# EAGLE board CORAZON_BIOMAKERS (EAGLE 9.3.0)
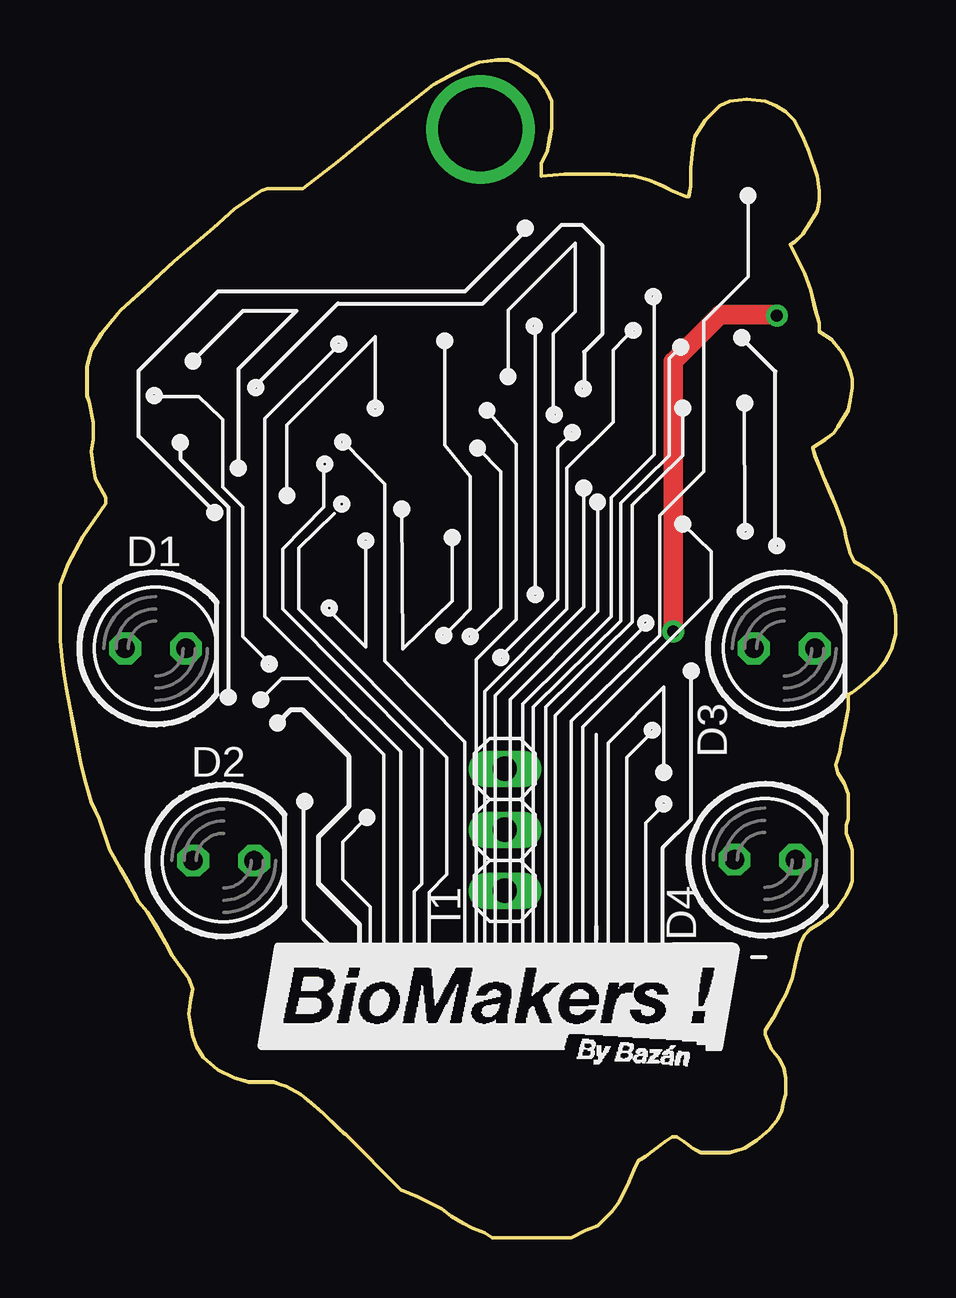
[diagram p0: board, top side]
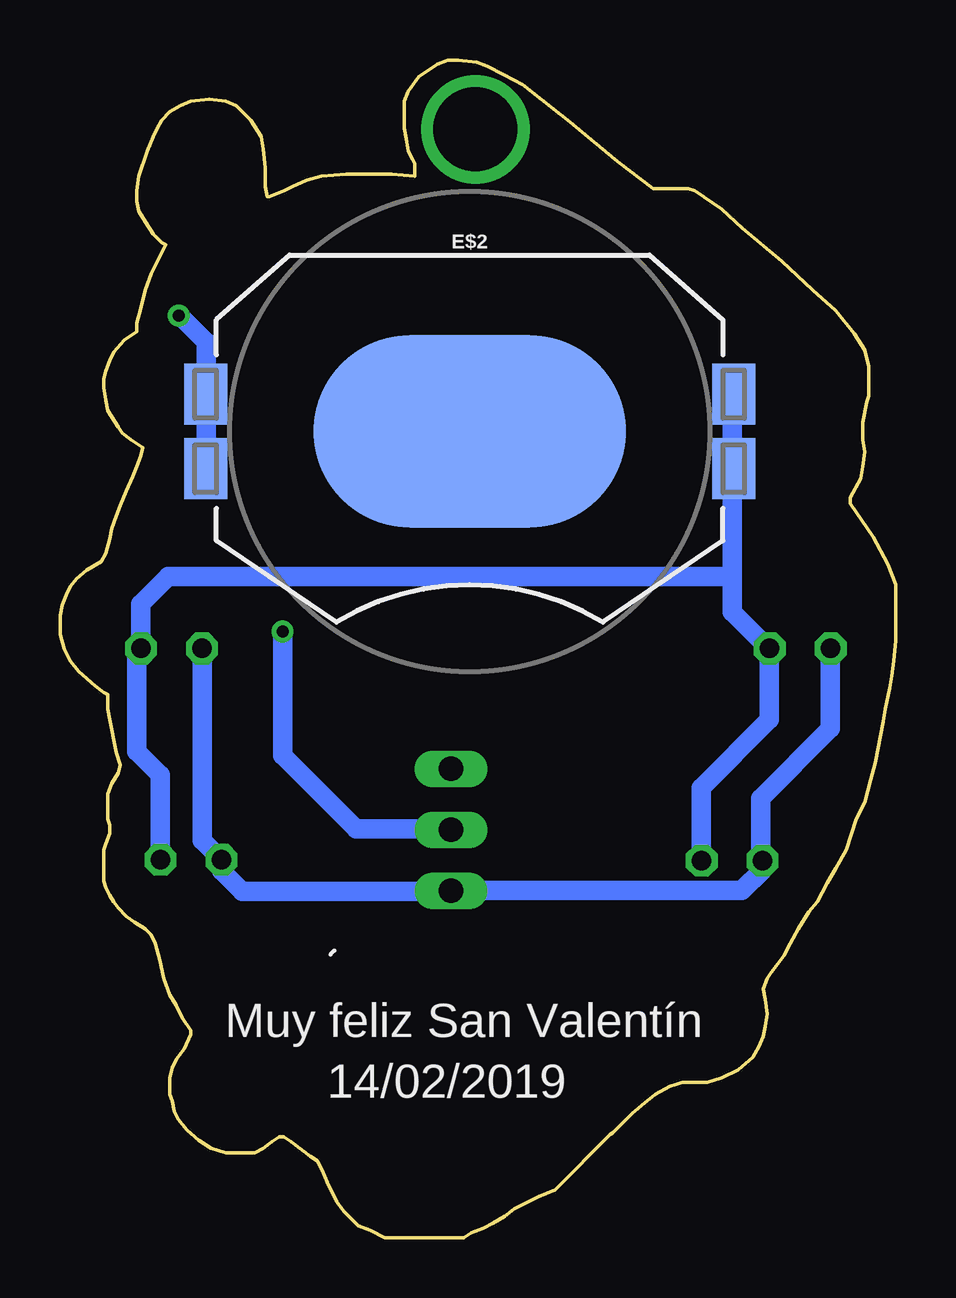
[diagram p1: board, bottom side, seen from below]

Size 34.83 x 49.09 mm. Coordinates in mm from the lower left corner, seen from the top.
Outline: 10.97,5.19 11.56,4.6 11.67,4.5 11.8,4.38 11.9,4.3 14.2,2 14.9,1.7 15.9,1.2 16.3,0.9 16.8,0.6 17.2,0.4 17.7,0.2 18,0 21.3,0 21.9,0.3 22.4,0.5 23,1.1 23.3,1.5 23.7,2.3 23.9,2.8 24.1,3.2 24.4,3.4 25.2,4 25.5,4.2 25.7,4.2 26,4 26.36,3.72 26.7,3.55 27.91,3.55 28.52,3.72 29.04,4.07 29.56,4.5 29.9,4.93 30.07,5.28 30.16,5.71 30.25,5.97 30.25,6.66 30.16,7.09 29.99,7.44 29.64,7.87 29.38,8.47 29.38,8.65 29.73,9.17 29.99,9.68 30.25,10.12 30.51,10.81 30.68,11.59 30.85,12.28 31.02,12.62 31.28,12.88 31.72,13.14 32.06,13.4 32.41,13.75 32.58,14.01 32.75,14.26 32.93,14.61 33.01,14.87 33.01,16.17 32.93,16.42 32.75,16.86 32.75,17.2 32.84,17.46 32.84,18.5 32.67,18.93 32.41,19.36 32.32,19.71 32.49,20.23 32.58,20.75 32.67,21.18 32.75,21.61 32.84,22.04 32.84,22.65 33.01,22.73 33.36,22.99 34.05,23.6 34.39,24.03 34.65,24.55 34.83,25.15 34.83,25.93 34.74,26.36 34.57,26.8 34.39,27.14 34.14,27.49 33.7,27.83 33.1,28.18 32.93,28.52 32.75,29.13 32.67,29.56 32.49,30.08 32.32,30.51 32.06,31.12 31.8,31.72 31.63,32.15 31.46,32.59 31.37,32.93 31.89,33.28 32.23,33.54 32.41,33.8 32.84,34.49 32.93,34.92 33.01,35.44 33.01,35.78 32.93,36.13 32.75,36.56 32.58,36.91 32.15,37.43 31.63,37.77 31.63,38.12 31.46,38.72 31.28,39.5 31.02,40.19 30.59,41.05 30.42,41.4 30.59,41.49 30.94,41.83 31.28,42.35 31.54,42.78 31.63,43.22 31.63,43.65 31.54,44.25 31.2,45.29 30.94,45.89 30.77,46.24 30.59,46.59 30.25,46.93 29.81,47.19 29.38,47.36 28.6,47.45 27.91,47.36 27.48,47.19 26.88,46.59 26.44,45.89 26.36,45.38 26.27,44.6 26.27,43.82 26.18,43.39 26.1,43.39 25.49,43.65 25.15,43.82 24.54,44.08 23.94,44.25 22.9,44.34 21,44.34 20.05,44.25 20.05,44.77 20.14,44.94 20.31,45.29 20.39,45.81 20.48,46.24 20.48,47.36 20.31,47.8 19.88,48.4 19.1,48.92 18.67,49.09 18.23,49.09 17.46,49.01 17.02,48.83 16.33,48.49 15.56,48.05 13.57,46.5 11.58,44.86 10.11,43.73 8.64,43.73 8.38,43.65 7.26,42.87 6.39,42.09 4.75,40.71 3.46,39.5 2.51,38.63 1.73,37.68 1.3,36.99 1.12,36.3 1.12,35.09 1.21,34.83 1.38,33.97 1.38,33.28 1.3,32.76 1.38,32.15 1.47,31.63 1.9,30.86 1.9,30.6 0.95,29.22 0.35,28.09 0,27.23 0,24.89 0.09,24.03 0.17,23.42 0.26,22.91 0.43,22.04 0.52,21.52 0.86,19.8 1.04,19.1 1.3,18.15 1.64,17.46 2.07,16.17 2.51,15.39 2.85,14.78 3.28,14.01 3.63,13.57 4.06,12.88 4.41,12.28 4.67,11.76 4.93,11.41 5.18,11.07 5.36,10.81 5.53,10.38 5.44,9.94 5.36,9.34 5.44,8.82 5.53,8.39 5.7,7.96 5.96,7.52 6.57,7.01 7.26,6.66 7.86,6.49 8.9,6.49 9.16,6.4 9.42,6.31 10.02,5.97 10.46,5.62 10.97,5.19
Copper layers (1*16): Top 0.035mm / dielectric 1.5mm / Bottom 0.035mm
Design rules "default": minimum track width 6mil, minimum drill 0.35mm, track to track 6mil, track to pad 6mil, pad to pad 6mil, via to via 6mil, smd to smd 6mil, copper to edge 40mil, drill to drill 6mil, minimum pad ring 10mil, minimum via ring 8mil, stop-mask expansion 4mil, vias tented up to drill 0mil, thermal gap 10mil

## Footprints (pad centres in the part's own frame; a part is rotated, then mirrored left to right if it is on the bottom)
LED5MM = drill 0.813 octagon: A -1.27,0; K 1.27,0
BATTCON_20MM_4LEGS_OVERPASTE = smd 1.778 x 2.54: 1 -11,1.55; 3 11,1.55; P$1 -11,-1.55; P$2 11,-1.55 | smd 13 x 8: 2 0,0
1X03 = drill 1.016 long: 1 -2.54,0; 2 0,0; 3 2.54,0

## Placement (x,y rotation side)
D1  [LED5MM]  3.98,24.56 0 top
D2  [LED5MM]  6.82,15.72 0 top
D3  [LED5MM]  30.18,24.56 0 top
D4  [LED5MM]  29.37,15.75 0 top
E$2  [BATTCON_20MM_4LEGS_OVERPASTE]  17.76,33.61 0 bottom
I1  [1X03]  18.53,17 90 top

## Library data of the parts
D1-D4 = led
E$2 = SparkFun-Batteries
I1 = pinhead

## Tracks (layer width: path | path; a pad name or v marks a point on that pad's centre or on a via)
S$1
  Bottom 0.813: 6.82,34.76 6.82,31.92
S$2
  Bottom 0.813: 5.3,24.56 6.82,26.08 6.82,34.82
S$3
  Bottom 0.813: 8.1,15.69 8.1,18.76 5.27,21.59 5.27,24.56
S$4
  Bottom 0.813: 30.65,15.79 30.65,19.3 31.63,20.28 31.63,24.39 31.46,24.56 31.46,26.42 30.31,27.57 6.92,27.57
S$5
  Bottom 0.813: 28.9,24.56 28.9,16.56 28.09,15.75 28.09,15.28 27.24,14.44 18.53,14.44
S$6
  Bottom 0.813: 2.74,24.63 2.74,21.22 5.64,18.32 5.64,15.79 5.57,15.72 5.57,15.31 6.41,14.47 18.65,14.47
S$7  (via drill 0.5 pad 0.7)
  Top 0.813: v25.55,25.27 25.55,36.51 27.51,38.47 29.87,38.47
  Bottom 0.813: 17.76,17.04 22.48,17.04 25.55,20.11 v25.55,25.27
S$8  (via drill 3.5 pad 4)
  other vias: 17.52,46.2
S$9
  Bottom 0.813: 29.87,38.47 28.73,37.32 28.73,31.55
S$10  (via drill 0.5 pad 0.7)
  other vias: 29.87,38.44

## Text on the board
bPlace: Muy feliz San Valentín | 14/02/2019